# Altium PCB BuckPCB.PcbDoc
Units mm, origin at the board's own origin, x right, y up, seen from the top; angles counter-clockwise.
Board outline 61.59 x 67.44 mm, 2 copper layers (Top Layer, Bottom Layer); 33 components, 14 nets, 96 pads, 35 vias.
Unrouted connection lines stored in the file: 1.
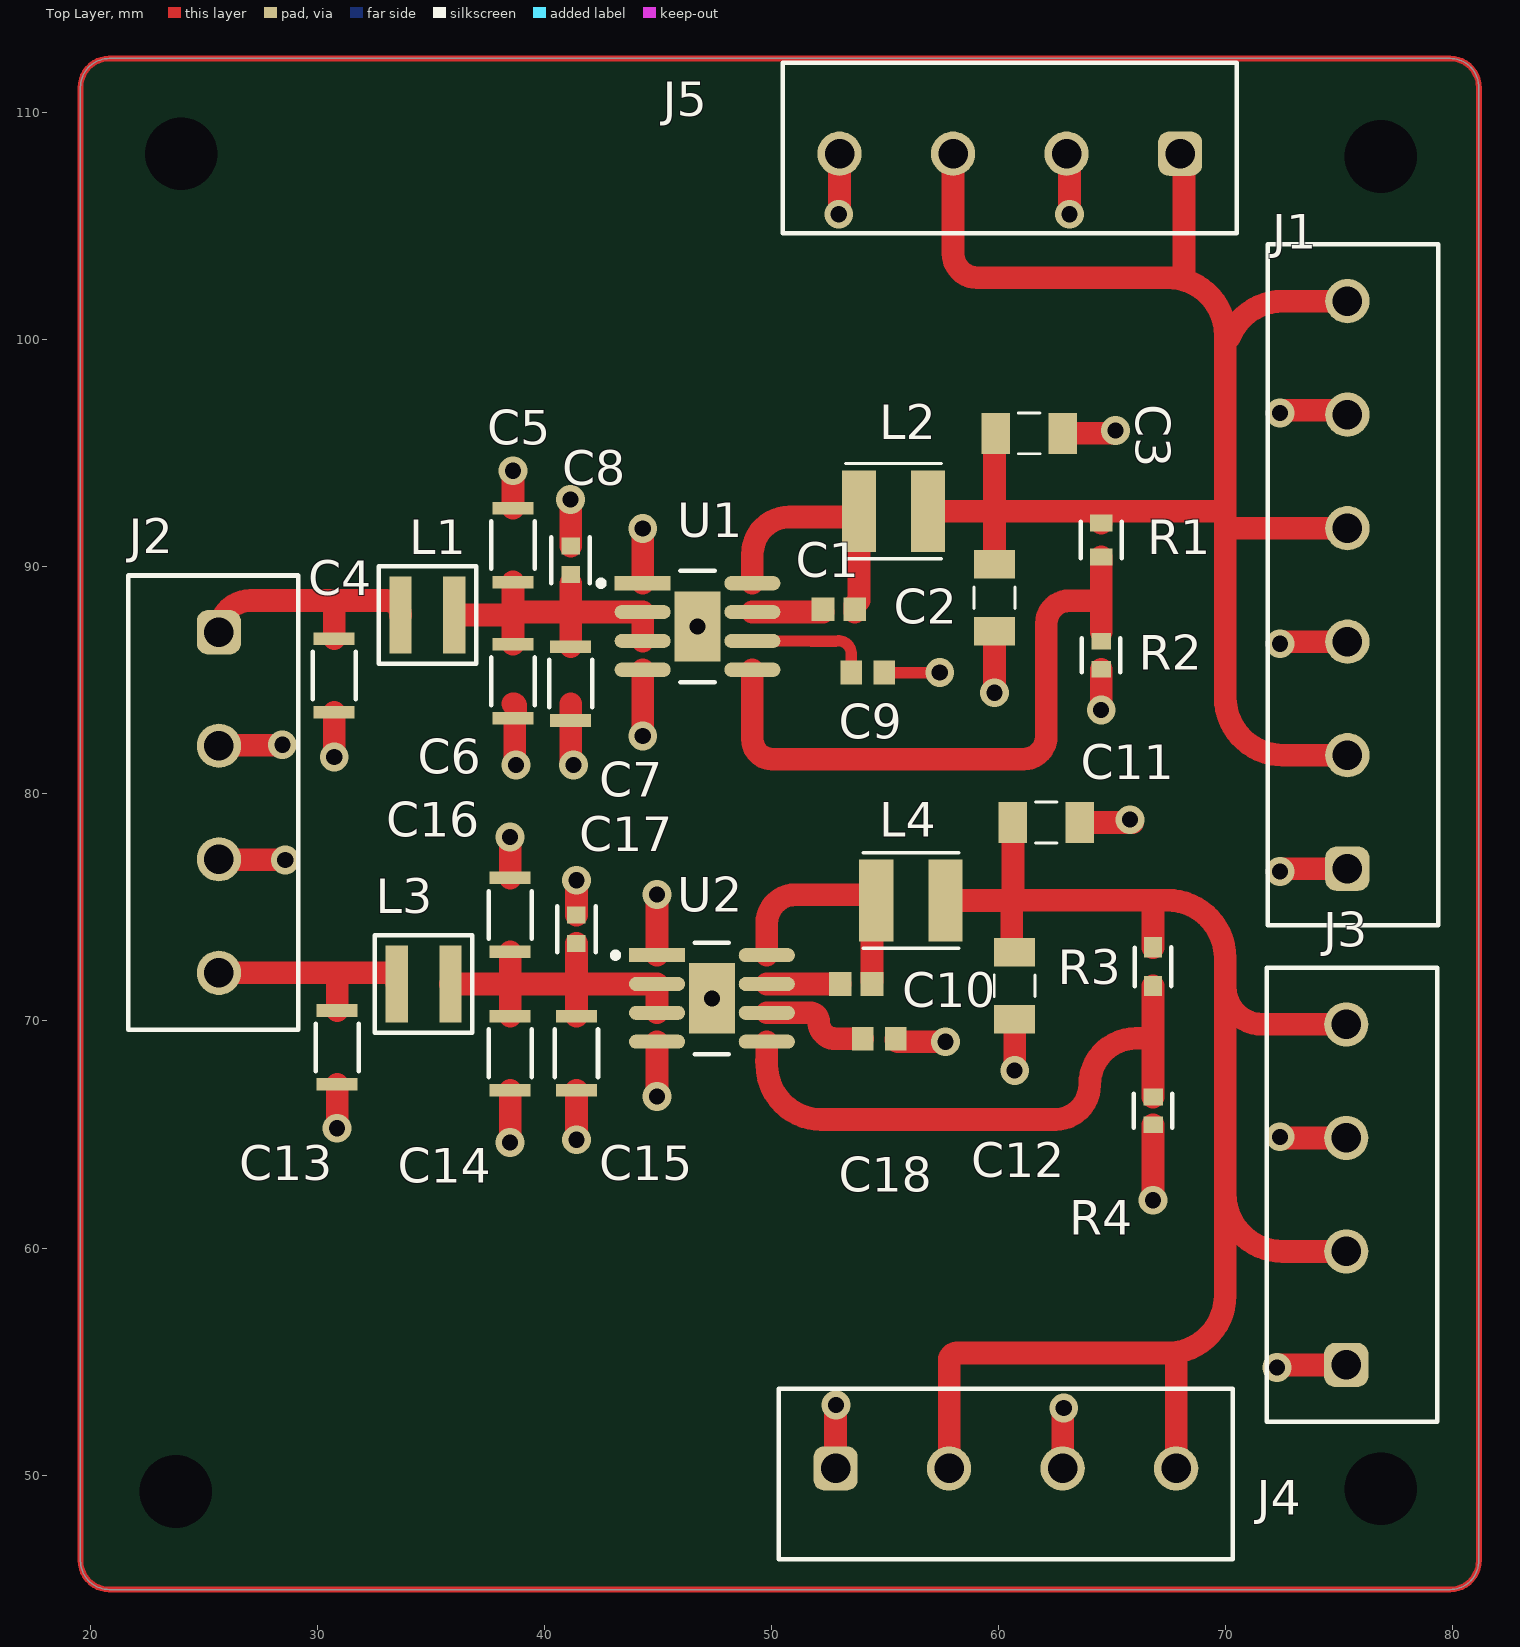
[diagram p0: Top Layer view]
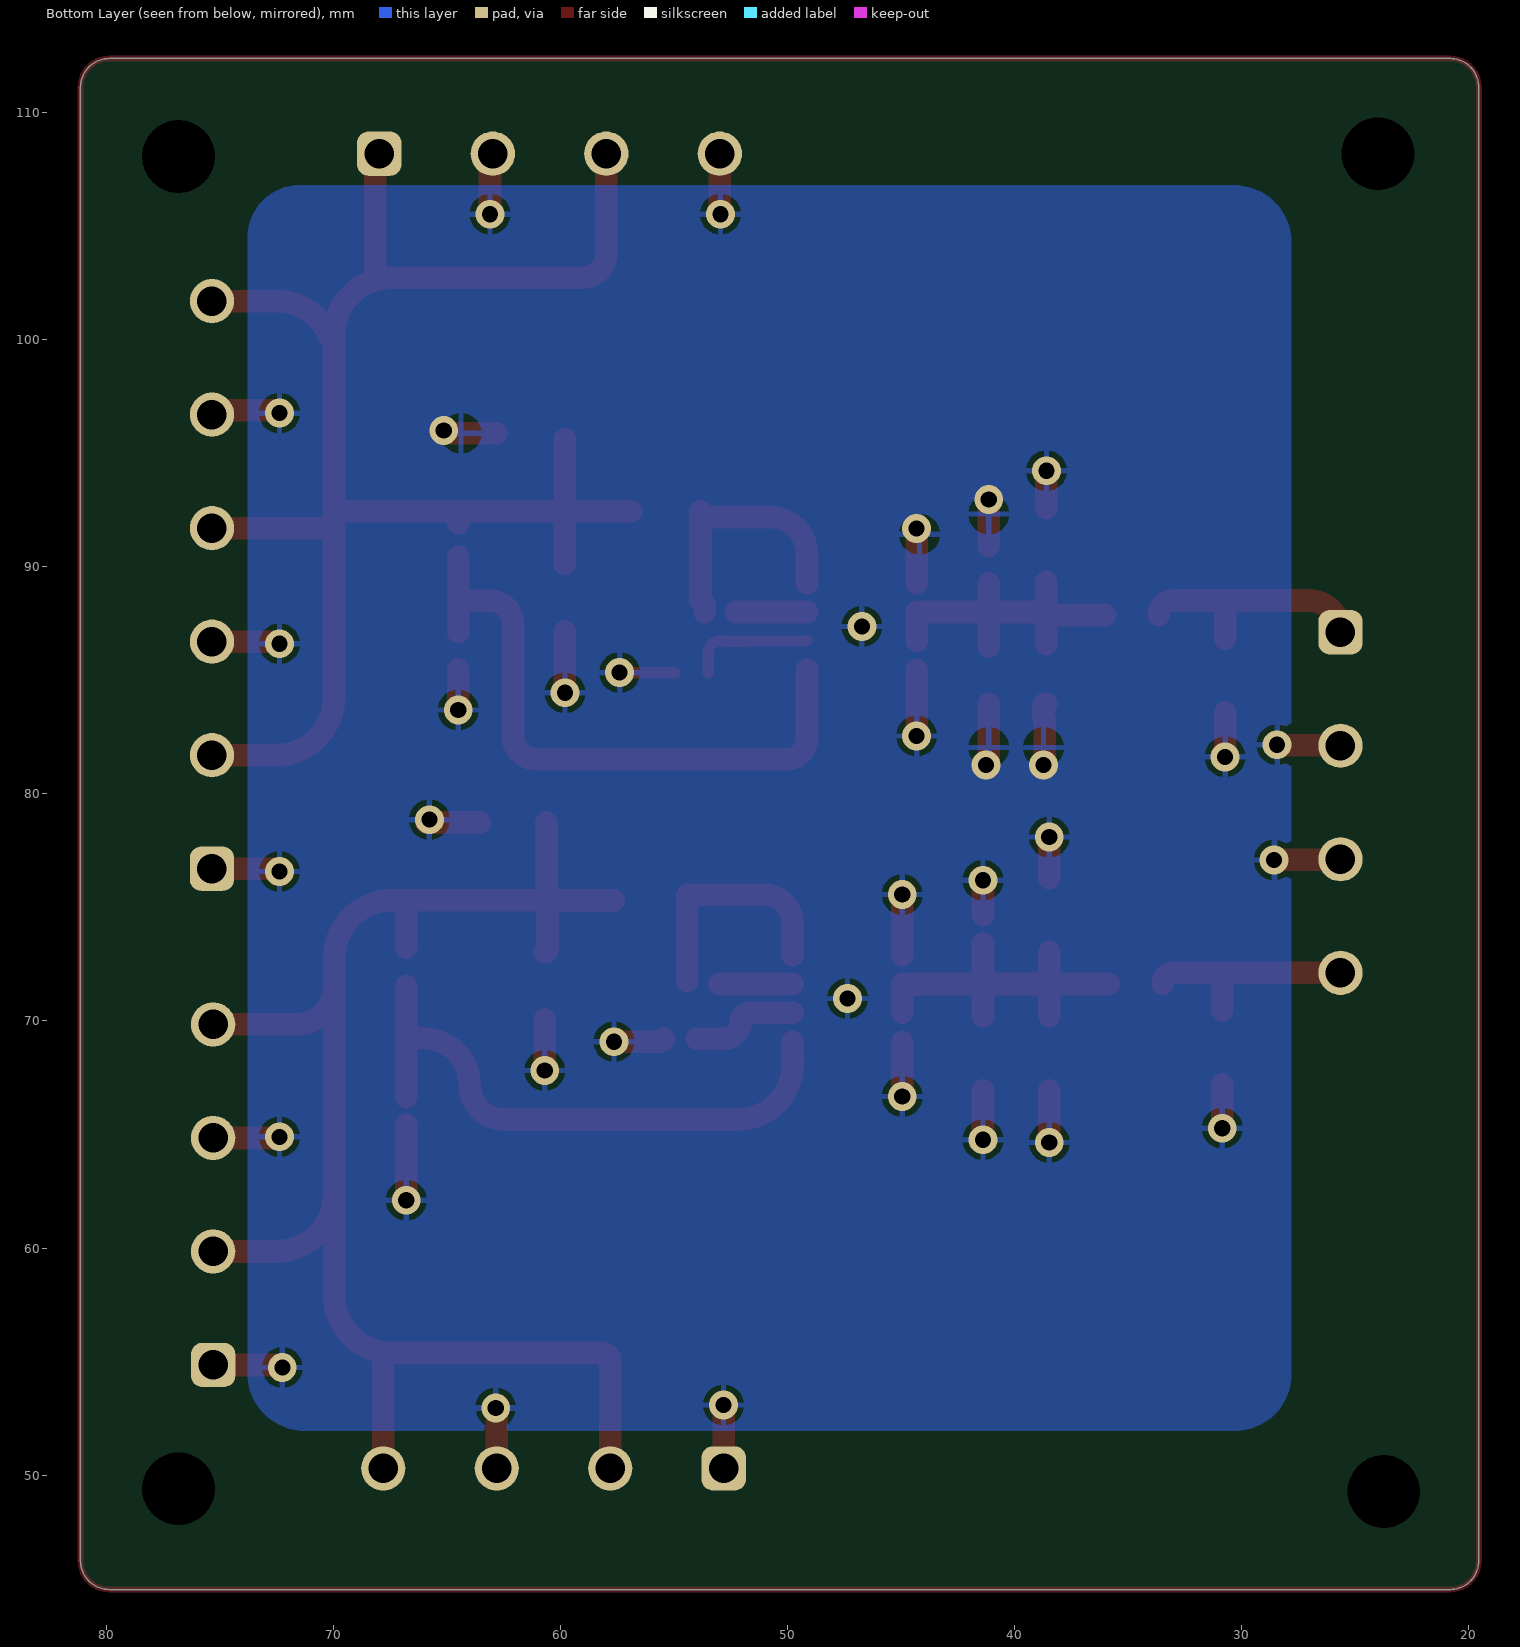
[diagram p1: Bottom Layer view, seen from below]
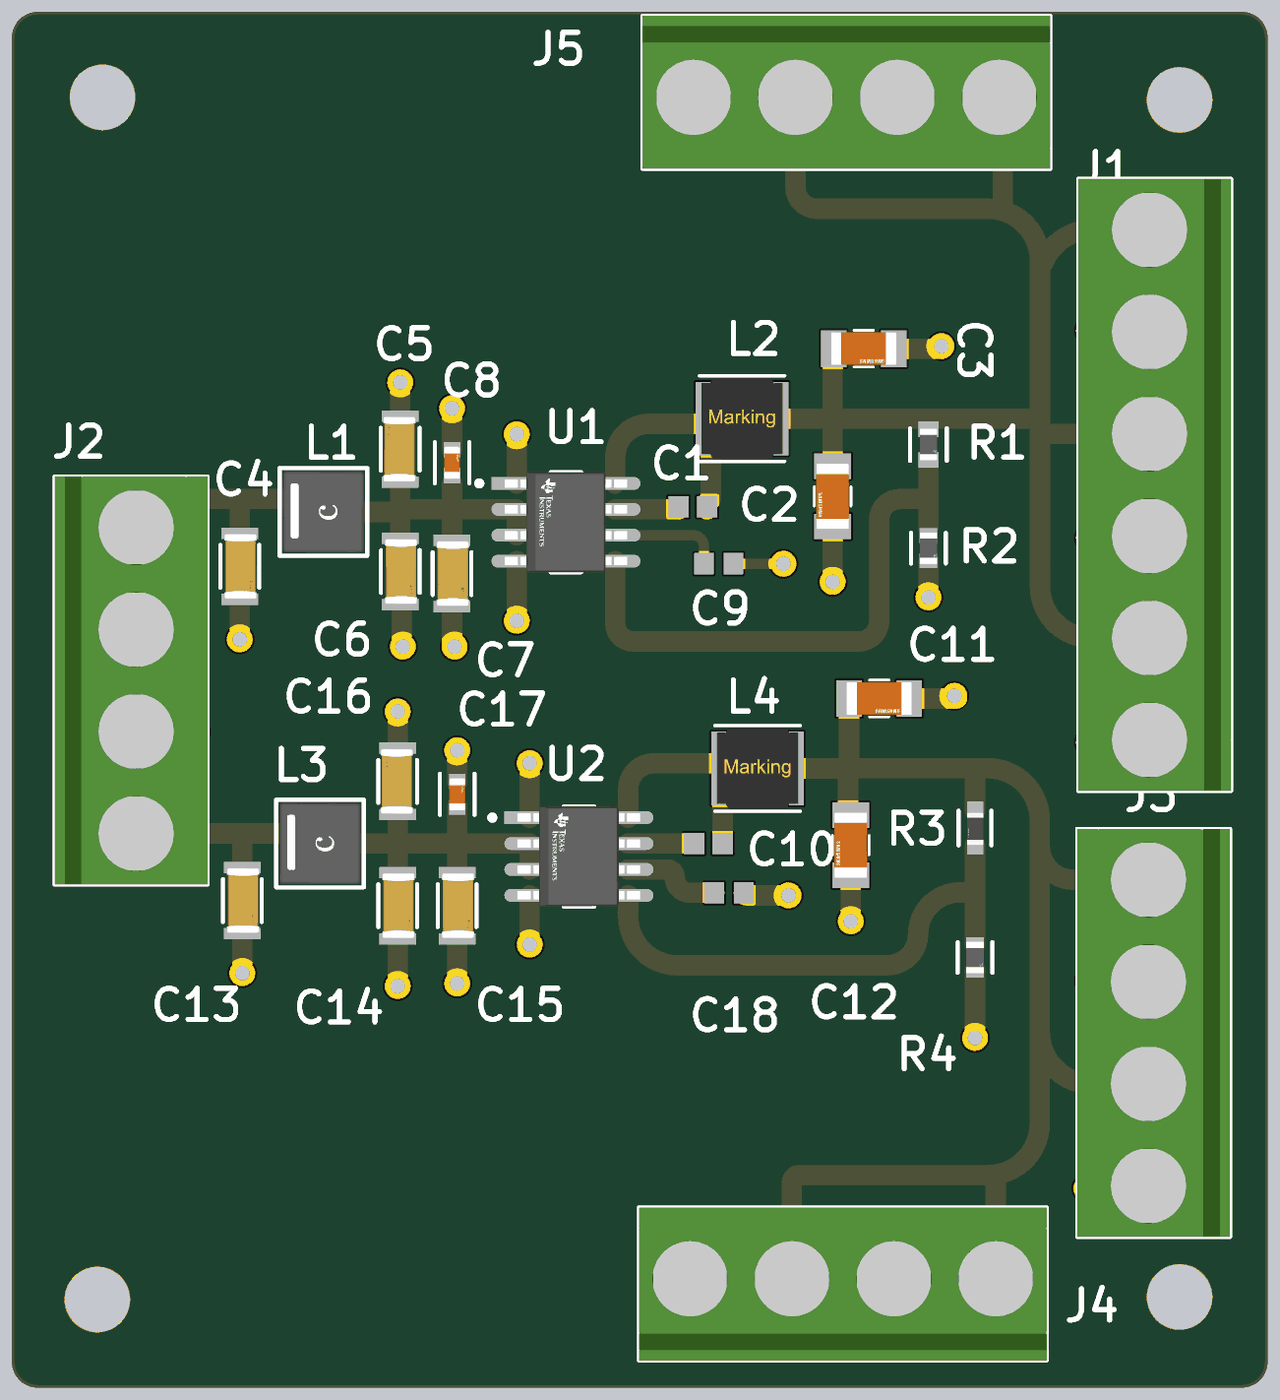
[diagram p2: 3D render of the assembled board from above, using the file's embedded part models]

## Layer stack, top to bottom
Top Solder: solder mask 0.0102, Solder Resist, Dk 3.5
Top Layer: signal copper 0.0356
Dielectric 1: dielectric 0.32, FR-4, Dk 4.8
Bottom Layer: signal copper 0.0356
Bottom Solder: solder mask 0.0102, Solder Resist, Dk 3.5

## Board outline
19.558,46.228 19.558,111.125 cw(c20.828,111.125) 20.828,112.395 79.883,112.395 cw(c79.883,111.125) 81.153,111.125 81.153,46.228 cw(c79.883,46.228) 79.883,44.958 20.828,44.958 cw(c20.828,46.228)

## Design rules (kind name [scope] priority, off if disabled: settings)
Clearance [All] p1: gap=0.2 ignorepadtopadclearanceinfootprint=FALSE
PolygonConnect [All] p1: connectstyle=Relief reliefconductorwidth=0.254 reliefentries=4 polygonreliefangle="90 Angle" airgapwidth=0.254
RoutingVias [All] p1: holewidth=0.711 width=1.27 viastyle="Through Hole" minholewidth=0.711 minwidth=1.27 maxholewidth=0.711 maxwidth=1.27
SolderMaskExpansion [All] p1: expansion=0.102 istentingtop=FALSE
SupplyNets "Schematic Supply Nets_3" [InNet('+3.3v')] p1: voltage=0.000
SupplyNets "Schematic Supply Nets_2" [InNet('GND')] p2: voltage=0.000
SupplyNets "Schematic Supply Nets_1" [InNet('+5')] p3: voltage=0.000
SupplyNets "Schematic Supply Nets" [InNet('+24V')] p4: voltage=0.000
Width [All] p1: maxlimit=2 minlimit=0.254 preferedwidth=1 minimp=50.000000 maximp=50.000000 favimp=50.000000
30 further rules are at their usual default settings.

## Classes and differential pairs
net class U2_Nets: GND NetC10_1 NetC10_2 NetC14_1 NetC18_2 NetR3_2
net class U1_Nets: GND NetC1_1 NetC1_2 NetC5_1 NetC9_2 NetR1_2
net class R4_Nets: GND NetR3_2
net class R3_Nets: +3.3v NetR3_2
net class R2_Nets: GND NetR1_2
net class R1_Nets: +5 NetR1_2
net class L4_Nets: +3.3v NetC10_2
net class L3_Nets: +24V NetC14_1
net class L2_Nets: +5 NetC1_2
net class L1_Nets: +24V NetC5_1
net class J3_Nets: +3.3v GND
net class J2_Nets: +24V GND NetJ2_1 NetJ2_2 NetJ2_3 NetJ2_4
net class J1_Nets: +5 GND
net class C18_Nets: GND NetC18_2
net class C17_Nets: GND NetC14_1
net class C16_Nets: GND NetC14_1
net class C15_Nets: GND NetC14_1
net class C14_Nets: GND NetC14_1
net class C13_Nets: +24V GND
net class C12_Nets: +3.3v GND
net class C11_Nets: +3.3v GND
net class C10_Nets: NetC10_1 NetC10_2
net class C9_Nets: GND NetC9_2
net class C8_Nets: GND NetC5_1
net class C7_Nets: GND NetC5_1
net class C6_Nets: GND NetC5_1
net class C5_Nets: GND NetC5_1
net class C4_Nets: +24V GND
net class C3_Nets: +5 GND
net class C2_Nets: +5 GND
net class C1_Nets: NetC1_1 NetC1_2
component class Buck: C1 C2 C3 C4 C5 C6 C7 C8 C9 C10 C11 C12 C13 C14 C15 C16 C17 C18 J1 J2 J3 L1 L2 L3 L4 R1 R2 R3 R4 U1 U2

## Components (designator, comment, footprint, x,y, rotation, side; value= is the part's Value field where it differs from the comment)
C1 "GRM188R71C104KA01D" MURA-0603_H_0.9_M 52.959,88.138 r0 top
C2 "CL31A226KAHNNNE" CL31H-0_2_MFG 59.817,88.646 r270 top
C3 "CL31A226KAHNNNE" CL31H-0_2_MFG 61.341,95.885 r0 top
C4 "CGA5L1X7R1H106K160AE" FP-CGA5L-0_3-0_1-IPC_C 30.734,85.217 r270 top
C5 "CGA5L1X7R1H106K160AE" FP-CGA5L-0_3-0_1-IPC_C 38.608,90.958 r90 top
C6 "CGA5L1X7R1H106K160AE" FP-CGA5L-0_3-0_1-IPC_C 38.608,84.963 r270 top
C7 "CGA5L1X7R1H106K160AE" FP-CGA5L-0_3-0_1-IPC_C 41.148,84.862 r270 top
C8 "GRM188R71H224KAC4D" FP-GRM188-0_1-e0_2_0_5-IPC_C 41.148,90.297 r90 top
C9 "GRM188R71C105KA12D" CAPC1608X90X35ML10T15 54.229,85.344 r0 top
C10 "GRM188R71C104KA01D" MURA-0603_H_0.9_M 53.721,71.628 r0 top
C11 "CL31A226KAHNNNE" CL31H-0_2_MFG 62.103,78.74 r0 top
C12 "CL31A226KAHNNNE" CL31H-0_2_MFG 60.706,71.55 r270 top
C13 "CGA5L1X7R1H106K160AE" FP-CGA5L-0_3-0_1-IPC_C 30.861,68.834 r270 top
C14 "CGA5L1X7R1H106K160AE" FP-CGA5L-0_3-0_1-IPC_C 38.481,68.58 r270 top
C15 "CGA5L1X7R1H106K160AE" FP-CGA5L-0_3-0_1-IPC_C 41.402,68.58 r270 top
C16 "CGA5L1X7R1H106K160AE" FP-CGA5L-0_3-0_1-IPC_C 38.481,74.676 r90 top
C17 "GRM188R71H224KAC4D" FP-GRM188-0_1-e0_2_0_5-IPC_C 41.402,74.041 r90 top
C18 "GRM188R71C105KA12D" CAPC1608X90X35ML10T15 54.737,69.215 r0 top
J1 "691137710006" 691137710006 75.611,89.208 r90 top
J2 "691137710004" 691137710004 25.404,79.622 r270 top
J3 "691137710004" 691137710004 75.561,62.35 r90 top
J4 "Comment" 691137710004 60.318,50.042 r0 top
J5 "Comment" 691137710004 60.492,108.454 r180 top
L1 "XAL4030-472MEC" FP-XAL4030-472MEC-MFG 34.84,87.884 r0 top
L2 "74404042100" WE-LQS_4018 55.372,92.456 r0 top
L3 "XAL4030-472MEC" FP-XAL4030-472MEC-MFG 34.671,71.628 r0 top
L4 "74404042100" WE-LQS_4018 56.134,75.311 r0 top
R1 "CRCW060380K6FKEC" FP-CRCW0603-e3-MFG 64.516,91.186 r270 top
R2 "CRCW060320K0FKEA" FP-CRCW0603-e3-IPC_C 64.516,86.106 r270 top
R3 "RT0603BRD07115KL" FP-RT0603-MFG 66.802,72.39 r270 top value=115KΩ
R4 "CRCW060350K0FKEA" FP-CRCW0603-e3-IPC_C 66.802,66.04 r270 top
U1 "LMR36520ADDAR" FP-DDA0008E-IPC_A 46.736,87.376 r0 top
U2 "LMR36520ADDAR" FP-DDA0008E-IPC_A 47.371,70.993 r0 top

## Footprints (in the part's own frame and the unit in brackets; to place one, negate y for a bottom-side part, rotate by r counter-clockwise, add the part's x,y. Pads: shape width x height; smd on the part's side, far side on the other; paste and mask are expansions set on the pad)
691137710004 [mm] "Horizontal Cable Entry with Pressure Clamp, pitch 5mm, 04p"
  rrect50% 1.95x1.95 hole 1.3: 1(-7.5,0.25)
  round 1.95 hole 1.3: 2(-2.5,0.25) 3(2.5,0.25) 4(7.5,0.25)
  silkscreen extent -10,-3.75 10,3.75, body extent -10,-3.75 10,3.75, height 11.6
691137710006 [mm] "Horizontal Cable Entry with Pressure Clamp, pitch 5mm, 06p"
  rrect50% 1.95x1.95 hole 1.3: 1(-12.5,0.25)
  round 1.95 hole 1.3: 2(-7.5,0.25) 3(-2.5,0.25) 4(2.5,0.25) 5(7.5,0.25) 6(12.5,0.25)
  silkscreen extent -15,-3.75 15,3.75, body extent -15,-3.75 15,3.75, height 11.6
CAPC1608X90X35ML10T15 [mm] "Chip Capacitor, 2-Leads, Body 1.60x0.80mm, IPC Low Density"
  rect 0.95x1.05 smd: 1(-0.725,0) 2(0.725,0)
  body extent -0.85,-0.45 0.85,0.45, height 0.9
CL31H-0_2_MFG [mm] "Recommended Land Pattern"
  rect 1.25x1.8 smd: 1(-1.475,0) 2(1.475,0)
  silkscreen extent -0.48,-0.9 0.48,0.9, body extent -1.6,-0.8 1.6,0.8, height 1.8
FP-CGA5L-0_3-0_1-IPC_C [mm]
  rect 0.556x1.806 smd paste+0 mask+0: 1(-1.625,0) 2(1.625,0)
  silkscreen extent -1.05,-0.95 1.05,0.95, body extent -2,-1.05 2,1.05, height 0.25
FP-CRCW0603-e3-IPC_C [mm]
  rect 0.735x0.862 smd paste+0 mask+0: 1(-0.615,0) 2(0.615,0)
  silkscreen extent -0.75,-0.85 0.75,0.85, body extent -1.08,-0.58 1.08,0.58, height 0.25
FP-CRCW0603-e3-MFG [mm]
  rect 0.75x1 smd paste+0 mask+0: 1(-0.75,0) 2(0.75,0)
  silkscreen extent -0.8,-0.9 0.8,0.9, body extent -1.22,-0.6 1.22,0.6, height 0.25
FP-DDA0008E-IPC_A [mm]
  rect 2.474x0.622 smd paste+0 mask+0: 1(-2.416,1.905)
  rrect100% 2.474x0.622 smd paste+0 mask+0: 2(-2.416,0.635) 3(-2.416,-0.635) 4(-2.416,-1.905) 5(2.416,-1.905) 6(2.416,-0.635) 7(2.416,0.635) 8(2.416,1.905)
  rect 2.025x3.1 smd paste-1000 mask+0: 9(0,0)
  silkscreen extent -4.37,-2.45 0.75,2.45, body extent -4.15,-2.95 4.15,2.95, height 0.25
FP-GRM188-0_1-e0_2_0_5-IPC_C [mm]
  rect 0.759x0.812 smd paste+0 mask+0: 1(-0.627,0) 2(0.627,0)
  silkscreen extent -1.01,-0.85 1.01,0.85, body extent -1.11,-0.55 1.11,0.55, height 0.25
FP-RT0603-MFG [mm]
  rect 0.9x0.8 smd paste+0 mask+0: 1(-0.85,0) 2(0.85,0)
  silkscreen extent -0.85,-0.81 0.86,0.8, body extent -1.4,-0.55 1.4,0.55, height 0.25
FP-XAL4030-472MEC-MFG [mm]
  rect 0.98x3.4 smd paste+0 mask+0: 1(-1.185,0) 2(1.185,0)
  silkscreen extent -2.15,-2.15 2.15,2.15, body extent -2.25,-2.25 2.25,2.25, height 0.25
MURA-0603_H_0.9_M [mm] "SMD, 2-Leads, Body 1.7x0.9mm, IPC Low Density"
  rect 1x1.05 smd: 1(-0.7,0) 2(0.7,0)
  body extent -0.85,-0.45 0.85,0.45, height 0.9
WE-LQS_4018 [mm] "SMD Power Inductor, 2-Leads, body 4x4mm"
  rect 1.5x3.6 smd: 1(-1.525,0) 2(1.525,0)
  silkscreen extent -2.1,-2.1 2.1,2.1, body extent -2,-2 2,2, height 1.8

## Part data
C1 C10: library part CMP-2000-05253-1, "CAP, Ceramic, 0.1 uF, 10%, 16 V, 0603, RoHS, Tape and Reel", Capacitance=0.1uF, Capacitance - nF=100nF, Capacitance - pF=100000pF, Case Code - in=0603, Case Code - mm=1608, Case Height=0.8mm, Case Length=1.6mm, Dielectric=X7R, Manufacturer=Murata, Maximum Operating Temperature=+125C, Minimum Operating Temperature=-55C, Operating Temperature Range=-55Cto+125C, Package / Case=0603(1608metric), Temperature Coefficient / Code=+/-15%, Tolerance=10%, Voltage Rating=16V, Brand=MurataElectronics, Case Width=0.8mm, Datasheet URL=https://datasheet.ciiva.com/29202/451467-da-01-en-vs-kondensator-0603-29202287.pdf, Datasheet Version=Dec-10, Dimensions=0.8mmWx1.6mmLx0.8mmH, Factory Pack Quantity=4000, Manufacturer URL=http://www.murata.com/, Packaging=Reel, Product=GeneralTypeMLCCs, Product Category=MultilayerCeramicCapacitorsMLCC-SMD/SMT, RoHS=Details, Series=GRM, Termination Style=SMD/SMT, Type=GeneralPurposeMLCC, Voltage Rating DC=16V
C2 C3 C11 C12: library part CMP-13271-000012-2, "Ceramic Capacitor, Multilayer, Ceramic, 25V, 10% +Tol, 10% -Tol, X5R, 15% TC, 22uF, Surface Mount, 1206", Capacitance=22µF, Case/Package=1206, Dielectric=X5R, Max Operating Temperature=85°C, Min Operating Temperature=-55°C, Tolerance=10%, Voltage Rating=25V, ComponentLink2Description="Datasheet URL", ComponentLink2URL=https://product.samsungsem.com/mlcc/CL31A226KAHNNN.do, Height=1.8mm, HelpURL=https://product.samsungsem.com/mlcc/CL31A226KAHNNN.do, Material=Ceramic, RoHS=Compliant, Voltage Rating (DC)=25V
C4 C5 C6 C7 C13 C14 C15 C16: library part CMP-08246-000430-1, "Cap Ceramic 10uF 50V X7R 10% Pad SMD 1206 +125°C Automotive T/R"
C8 C17: library part CMP-06035-003691-1, "Chip Multilayer Ceramic Capacitors for General Purpose, 0603, 0.22uF, X7R, 15%, 10%, 50V", Capacitance=220nF, Case Code (Imperial)=0603, Case Code (Metric)=1608, Max Operating Temperature=125°C, Min Operating Temperature=-55°C, Tolerance=10%, Voltage Rating=50V, Case/Package=0603, Lead Free="Lead Free", Length=0.063inch, Mount="Surface Mount", Packaging="Tape and Reel", Thickness=0.035inch, Voltage Rating (DC)=50V, Width=0.031inch
C9 C18: library part CMP-2006-02845-1, Manufacturer=Murata, Part Number=GRM188R71C105KA12D
J1: library part CMP-1502-03328-2, Current Rating=16A, Max Operating Temperature=120°C, Min Operating Temperature=-30°C, Voltage Rating=300V, Contact Material="Nickel, Tin", Height=11.6mm, Lead Pitch=5mm, NexarPartId=78871143, Number of Contacts=6, Number of Pins=6, Number of Rows=1, Packaging=Box, RoHS=Non-Compliant
J2 J3: library part CMP-1502-03326-2, Lead Pitch=5mm, NexarPartId=78871140, Number of Pins=4, Packaging=Box, RoHS=Non-Compliant
L1 L3: library part CMP-11268-000082-1, "Power Inductor (SMD), 4.7 µH, 5.1 A, Shielded, 4.5 A, XAL40xx Series, 4mm x 4mm x 3.1mm", Case/Package=SMD/SMT, DC Resistance (DCR)=44.1mR, Inductance=4.7uH, Inductance Tolerance=20%, Max DC Current=5.1A, Max Operating Temperature=125°C, Min Operating Temperature=-40°C, Package Quantity=500, Saturation Current=4.5A, Self Resonant Frequency=36MHz, Test Frequency=100kHz, Core Material=Composite, Height=3.1mm, Lead Free="Contains Lead", Length=4.3mm, Mount="Surface Mount", Packaging="Tape and Reel", REACH SVHC="No SVHC", RMS Current (Irms)=5.1A, RoHS Compliant=Yes, Series=XAL4030, Shielding=Shielded, Termination=SMD/SMT, Tolerance=20%, Width=4.3mm
L2 L4: library part CMP-1354-00028-2, Ambient Temperature Range High=85°C, Ambient Temperature Range Low=-40°C, Case/Package=Nonstandard, Current Rating=1.2A, DC Resistance (DCR)=150mΩ, Inductance=10µH, Inductance Tolerance=20%, Max Operating Temperature=125°C, Saturation Current=1.5A, Self Resonant Frequency=28MHz, Series Resistance=180mΩ, Test Frequency=100kHz, Composition=Wirewound, Core Material=Ferrite, Height=1.8mm, Height - Seated (Max)=1.8034mm, Length=4mm, Max DC Current=1.2A, Min Operating Temperature=-40°C, Mount="Surface Mount", NexarPartId=46948255, Packaging="Tape & Reel (TR)", REACH SVHC=Unknown, RMS Current (Irms)=1.2A, RoHS=Compliant, Shielding=Shielded, Termination=SMD/SMT, Tolerance=20%, Width=4mm
R1: library part CMP-02407-002214-1, "RES Thick Film, 80.6kΩ, 1%, 0.1W, 100ppm/°C, 0603", Case/Package=0603, Max Operating Temperature=155°C, Max Power Dissipation=100mW, Min Operating Temperature=-55°C, Package Quantity=20000, Resistance=80.6kR, Temperature Coefficient=100ppm/°C, Tolerance=1%, Composition="Thick Film", Features="Automotive AEC-Q200", Height=0.02inch, Lead Free="Lead Free", Length=0.061inch, Number of Terminations=2, Packaging="Tape and Reel", Width=0.033inch
R2: library part CMP-2000-03068-2, "RES Thick Film, 20kΩ, 1%, 0.1W, 100ppm/°C, 0603", Case Code (Imperial)=0603, Case Code (Metric)=1608, Max Operating Temperature=155°C, Min Operating Temperature=-55°C, Package Quantity=5000, Power Rating=100mW, Resistance=20kR, Temperature Coefficient=100ppm/°C, Tolerance=1%, Voltage Rating=75V, Case/Package=0603, Composition="Thick Film", Contact Plating=Tin, Depth=0.85mm, Height=0.45mm, Lead Free="Lead Free", Length=1.55mm, Military Standard=Not, Mount="Surface Mount", Number of Pins=2, Packaging="Tape and Reel", Radiation Hardening=No, Termination=SMD/SMT, Voltage Rating (DC)=75V, Weight=7.1E-05oz, Width=0.85mm
R3: library part CMP-03412-024509-1, "RES SMD 115K OHM 0.1% 1/10W 0603", Manufacturer=Yageo, Package=RT0603, Power Rating=0.1W, Resistance=115KΩ, Temperature="-55°C to +155°C", Temperature Coefficient="25 ppm/°C", Temperature Range High=+155°C, Temperature Range Low=-55°C, Tolerance=0.001, Voltage Rating=75V, Automotive=No, Category=Res, ComponentLink2Description=Datasheet, ComponentLink2URL=http://www.yageo.com/documents/recent/PYu-RT_1-to-0.01_RoHS_L_9.pdf, Composition="Thin Film", Device Class L1="Passive Components", Device Class L2=Resistors, Device Class L3="Chip SMD Resistors", Digikey Description="RES SMD 115K OHM 0.1% 1/10W 0603", Footprint Url=http://www.yageo.com/exep/pages/download/literatures/PYu-R_Mount_10.pdf, Height=0.55mm, Ipc Land Pattern Name=RESC16080X45, Lead Free=Yes, Manufacturer Part Number=RT0603BRD07115KL, Mouser Description="Res Thin Film 0603 115K Ohm 0.1% 1/10W ±25ppm/°C Molded SMD SMD Paper T/R", Octopart=https://octopart.com/rt0603brd07115kl-yageo-1461905, RoHS=TRUE, Series=RT
R4: library part CMP-02407-003705-1, "RES Thick Film, 50kΩ, 1%, 0.1W, 100ppm/°C, 0603"
U1 U2: library part CMP-04918-000502-1, "IC DC/DC BUCK CONVERTER 65V 2A"

## Free pads (board coordinates)
  round 1.524 hole 3.2: 2(23.749,49.276) 5(76.835,108.077) 6(76.835,49.403) ""(24.003,108.204)

## Via types
v1: diameter 1.27, hole 0.711, Top Layer to Bottom Layer, 35 vias

## Nets (pads, with @x,y where several pads share a name; then routed paths per layer and width w, separated by ;. In a path a pad name is that pad's centre, name@x,y a point inside that pad or via, vN(x,y) a via of type N, cw(c..) or ccw(c..) an arc to the next point about the centre after c; other vN are vias at no path point)
+3.3v: C11.1 C12.1 J3.2 J3.4 J4.2 J4.4 L4.2 R3.1 | length 73.5
  Top Layer w1: L4.2 60.579,75.311 ; J4.2 57.818,55.024 cw(c58.166,55.024) 58.166,55.372 67.437,55.372 ; C11.1 60.628,75.389 ccw(c60.706,75.389) 60.706,75.311 60.579,75.311 ; 60.695,75.322 66.802,75.322 ; C12.1 cw(c60.706,73.152) 60.579,73.152 60.579,75.311 ; R3.1 66.802,75.322 ; J4.4 67.818,54.991 ccw(c67.437,54.991) 67.437,55.372 ; J3.2 72.517,59.85 cw(c72.517,62.39) 69.977,62.39 ; J3.4 71.628,69.85 cw(c71.628,71.501) 69.977,71.501 ; 66.802,75.322 67.426,75.322 cw(c67.426,72.771) 69.977,72.771 69.977,71.501 ; 67.437,55.372 ccw(c67.437,57.912) 69.977,57.912 69.977,62.39 ; 69.977,62.39 69.977,71.501
+5: C2.1 C3.1 J1.2 J1.4 J1.6 J5.1 J5.3 L2.2 R1.1 | length 77.5
  Top Layer w1: L2.2 59.817,92.456 ; J5.3 57.992,103.806 ccw(c59.055,103.806) 59.055,102.743 67.443,102.743 cw(c67.443,100.203) 69.983,100.203 69.983,92.618 ; C2.1 59.817,92.456 ; C3.1@59.817,95.631 59.817,92.456 ; R1.1 ccw(c63.996,91.936) 63.996,92.456 ; J5.1 cw(c67.992,108.028) 68.168,108.028 68.168,102.637 ; 70.171,100.126 cw(c72.523,99.168) 72.523,101.708 J1.6@75.311,101.708 ; J1.2@75.311,81.708 72.523,81.708 cw(c72.523,84.248) 69.983,84.248 69.983,91.821 ; J1.4@75.311,91.708 70.096,91.708 cw(c70.096,91.821) 69.983,91.821 ; 59.817,92.456 63.996,92.456 ; 63.996,92.456 69.821,92.456 ccw(c69.821,92.618) 69.983,92.618 ; 69.983,91.821 69.983,92.618
+24V: C4.1 C13.1 J2.1 J2.4 L1.1 L3.1 | length 20.7
  Top Layer w1: J2.4 30.861,72.122 ; J2.1 cw(c27.051,87.122) 27.051,88.519 30.861,88.519 ; C4.1 30.734,88.392 cw(c30.861,88.392) 30.861,88.519 ; C13.1 30.861,72.122 ; L3.1 ccw(c32.992,71.628) 32.992,72.122 30.861,72.122 ; L1.1 ccw(c33.02,87.884) 33.02,88.519 30.861,88.519
GND: C2.2 C3.2 C4.2 C5.2 C6.2 C7.2 C8.2 C9.2 C11.2 C12.2 C13.2 C14.2 C15.2 C16.2 C17.2 C18.2 J1.1 J1.3 J1.5 J2.2 J2.3 J3.1 J3.3 J4.1 J4.3 J5.2 J5.4 R2.2 R4.2 U1.1 U1.4 U2.1 U2.4 U2.9 | length 82.3
  Top Layer w0.5: C9.2 v1(57.404,85.344)
  Top Layer w1: J2.3 25.671,77.106 28.558,77.106 v1(28.575,77.089) ; J2.2 25.677,82.146 28.425,82.146 v1(28.448,82.169) ; v1(30.734,81.635) C4.2 ; v1(30.861,65.278) C13.2 ; v1(38.481,64.643) C14.2 ; C16.2 v1(38.481,78.105) ; 38.608,83.973 cw(c38.608,83.846) 38.735,83.846 38.735,83.338 38.683,83.286 38.683,81.332 v1(38.735,81.28) ; C5.2 v1(38.608,94.234) ; 41.148,83.973 41.148,81.48 41.275,81.353 v1(41.275,81.28) ; C8.2 v1(41.148,92.964) ; v1(41.402,64.77) C15.2 ; C17.2 v1(41.402,76.2) ; U1.4 44.321,85.469 44.321,82.552 v1(44.323,82.55) ; U1.1 44.321,89.283 44.321,91.692 v1(44.323,91.694) ; v1@44.955,66.926 U2.4 ; U2.1 v1(44.955,75.568) ; J4.1 52.818,53.086 v1(52.832,53.086) ; v1(52.959,105.537) ccw(c52.959,105.57) 52.992,105.57 J5.4 ; C18.2 ccw(c55.589,69.215) 55.589,69.088 v1(57.658,69.088) ; v1(59.817,84.455) C2.2 ; v1(60.706,67.818) C12.2 ; C3.2 64.951,95.885 65.078,96.012 v1(65.151,96.012) ; J4.3 62.818,52.912 cw(c62.865,52.912) v1(62.865,52.959) ; J5.2 cw(c62.992,108.077) 63.119,108.077 v1(63.119,105.537) ; C11.2 v1@65.913,78.74 ; v1(64.516,83.693) R2.2 ; v1(66.802,62.103) R4.2 ; v1(72.263,54.737) cw(c72.376,54.737) 72.376,54.85 J3.1 ; v1(72.39,64.897) ccw(c72.437,64.897) 72.437,64.85 J3.3 ; v1(72.39,76.581) cw(c72.517,76.581) 72.517,76.708 J1.1@75.311,76.708 ; v1(72.39,86.614) cw(c72.484,86.614) 72.484,86.708 J1.3@75.311,86.708 ; v1@72.517,96.901 75.118,96.901 cw(c75.118,96.708) J1.5@75.311,96.708
  other v1: 44.958,66.675 47.371,70.993 65.786,78.867 46.736,87.376 72.39,96.774
NetC1_1: C1.1 U1.7 | length 3.1
  Top Layer w1: U1.7 C1.1@52.259,88.011
NetC1_2: C1.2 L2.1 U1.8 | length 11.2
  Top Layer w1: U1.8 49.152,90.554 cw(c50.8,90.554) 50.8,92.202 L2.1@53.593,92.202 ; C1.2@53.659,88.011 53.659,88.329 53.847,88.517 L2.1
NetC5_1: C5.1 C6.1 C7.1 C8.1 L1.2 U1.2 U1.3 | length 15.2
  Top Layer w1: L1.2 38.608,87.884 ; C6.1 38.608,87.884 ; C5.1 38.608,87.884 ; C7.1 41.148,89.281 ; U1.3 U1.2 38.735,88.011 ccw(c38.735,87.884) 38.608,87.884
NetC9_2: C9.1 U1.6 | length 5.5
  Top Layer w0.5: U1.6 51.755,86.732 ccw(c51.759,87.486) 51.759,86.732 52.759,86.732 ccw(c52.759,87.486) 52.797,86.733 52.959,86.741 cw(c52.959,86.196) 53.504,86.196 C9.1
NetC10_1: C10.1 U2.7 | length 3.2
  Top Layer w1: U2.7 C10.1
NetC10_2: C10.2 L4.1 U2.8 | length 10.5
  Top Layer w1: U2.8 49.787,74.298 cw(c51.054,74.298) 51.054,75.565 54.355,75.565 cw(c54.355,75.499) 54.421,75.499 C10.2@54.421,71.755
NetC14_1: C14.1 C15.1 C16.1 C17.1 L3.2 U2.2 U2.3 | length 16.4
  Top Layer w1: L3.2 38.481,71.628 ; C14.1 38.481,71.628 ; C16.1 38.481,71.628 ; C15.1 41.402,71.628 ; C17.1 41.402,71.628 ; U2.3 U2.2 41.402,71.628 ; 38.481,71.628 41.402,71.628
NetC18_2: C18.1 U2.6 | length 4.9
  Top Layer w1: U2.6 51.689,70.358 cw(c51.689,69.977) 52.07,69.977 ccw(c52.832,69.977) 52.832,69.215 C18.1
NetR1_2: R1.2 R2.1 U1.5 | length 28.5
  Top Layer w1: U1.5 49.152,82.42 ccw(c50.038,82.42) 50.038,81.534 61.087,81.534 ccw(c61.087,82.55) 62.103,82.55 62.103,87.503 cw(c63.115,87.503) 63.115,88.515 64.252,88.515 ccw(c64.252,88.779) 64.516,88.779 ; 64.516,87.122 64.516,88.515 64.516,88.779 ; R1.2 64.516,88.779
NetR3_2: R3.2 R4.1 U2.5 | length 26.2
  Top Layer w1: 49.767,68.238 ccw(c49.767,68.257) 49.787,68.257 U2.5 ; 49.787,68.072 ccw(c52.2,68.072) 52.2,65.659 62.484,65.659 ccw(c62.484,67.183) 64.008,67.183 cw(c66.06,67.183) 66.06,69.235 66.802,69.235 ; R4.1 66.802,69.235 ; R3.2 66.802,69.235
pads on no net: U1.9
copper on no net: | length 255.9
  Top Layer w0.254: 19.558,46.228 ccw(c20.828,46.228) 20.828,44.958 79.883,44.958 ccw(c79.883,46.228) 81.153,46.228 81.153,111.125 ccw(c79.883,111.125) 79.883,112.395 20.828,112.395 ccw(c20.828,111.125) 19.558,111.125 19.558,46.228

## Polygon pours and split planes (outlines as drawn)
GND on Bottom Layer "GND_L02_P002" (solid, pour order 2): 73.787,54.483 cw(c71.247,54.483) 71.247,51.943 30.353,51.943 cw(c30.353,54.483) 27.813,54.483 27.813,104.267 cw(c30.353,104.267) 30.353,106.807 71.501,106.807 cw(c71.501,104.521) 73.787,104.521 73.787,103.124